# Altium PCB Main.PcbDoc (part 2 of 2)
Units mm, origin at the board's own origin, x right, y up, seen from the top; angles counter-clockwise.
Board outline 112.5 x 86 mm, 4 copper layers (Top Layer, Layer 2, Layer 3, Bottom Layer), stack 1.334 mm thick; 103 components, 96 nets, 354 pads, 15 vias.
Unrouted connection lines stored in the file: 144.
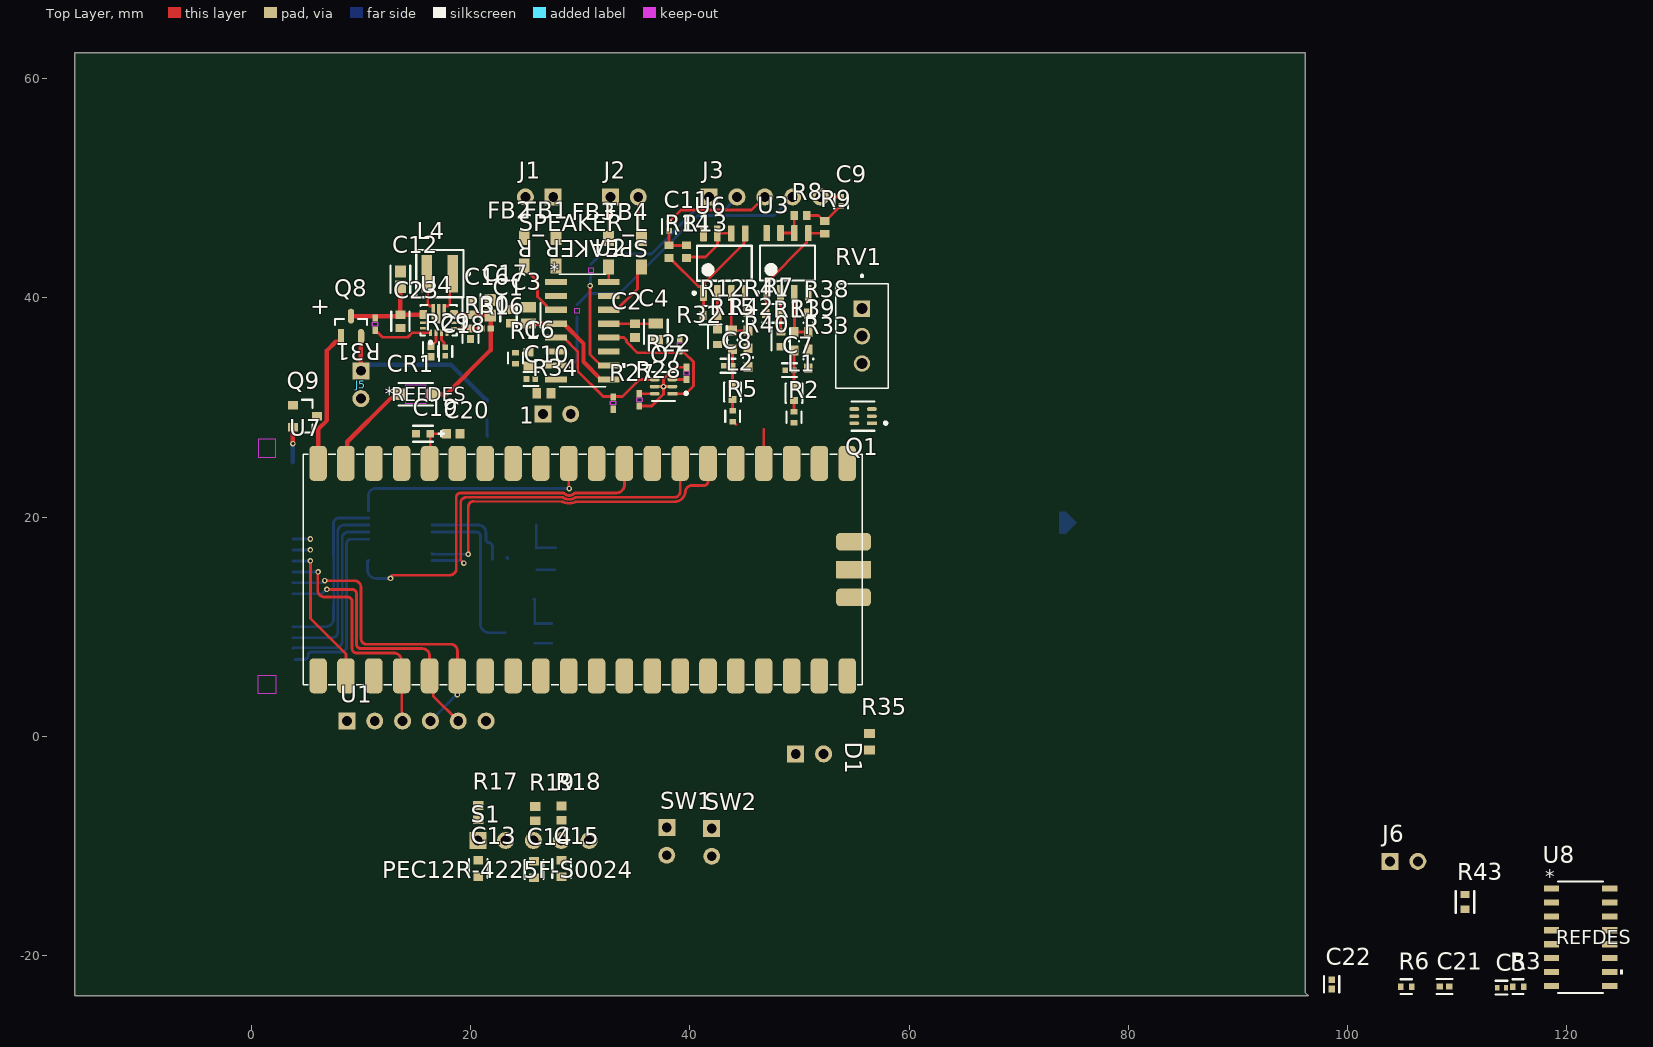
[diagram p0: Top Layer view]

## Via types
v1: diameter 0.508, hole 0.256, Top Layer to Bottom Layer, 15 vias

## Nets (pads, with @x,y where several pads share a name; then routed paths per layer and width w, separated by ;. In a path a pad name is that pad's centre, name@x,y a point inside that pad or via, vN(x,y) a via of type N, cw(c..) or ccw(c..) an arc to the next point about the centre after c; other vN are vias at no path point) (continued)
NetR7_2: (continued)
  Top Layer w0.254: R7.2 47,38.647 U3.1 47.037,40.487 47.037,41.407 50.657,45.027 50.657,45.747 U3.5 50.835,45.875 R9.1@52.3,45.875
NetR8_1: R8.1 U3.6 U3.7 | length 2.9
  Top Layer w0.254: U3.7 U3.6 49.532,45.908 49.532,47.493 R8.1
NetR10_2: R10.2 U2.10 | length 9.3
  Top Layer w0.254: v1(30.9,41.1) 30.9,34.827 31.902,33.825 U2.10
  Bottom Layer w0.254: v1(30.9,41.1) 30.949,41.149 30.949,41.89 R10.2
NetR12_1: R12.1 R15.2 U6.2 | length 3.5
  Top Layer w0.254: U6.2 42.515,38.4 R15.2 R15.2@42.6,37
NetR12_2: R12.2 R14.1 U6.1 U6.5 | length 12.9
  Top Layer w0.254: R14.1 38.175,43.625 40.777,41.023 41.263,41.023 41.348,40.938 41.348,41.348 44.952,44.952 44.952,45.772 U6.5 ; R12.2@41.245,38.4 U6.1
NetR13_1: R13.1 U6.6 U6.7 | length 5.7
  Top Layer w0.254: R13.1@39.7,43.575 39.842,43.717 41.417,43.717 42.515,44.815 U6.7 U6.6
NetR16_1: R16.1 R30.2 U4.5 | length 2.5
  Top Layer w0.254: U4.5 19.075,37.225 19.1,37.2 R30.2 R16.1
NetR29_1: R29.1 U4.2 | length 1.4
  Top Layer w0.254: R29.1 16.4,35.6 16.609,35.809 16.631,35.809 16.85,36.029 U4.2
NetR31_2: R31.2 U4.1 U4.14 | length 5.5
  Top Layer w0.254: R31.2 11.3,36.965 11.427,36.838 11.538,36.838 11.976,36.4 13.9,36.4 14.279,36.4 14.679,36.8 U4.1
NetR33_1: R33.1 R38.2 R39.2 U3.3 | length 6.5
  Top Layer w0.254: U3.3 49.54,36.91 R39.2 R38.2 R33.1
NetR40_1: R40.1 R41.2 R42.2 U6.3 | length 6.5
  Top Layer w0.254: U6.3 43.785,37.115 R42.2 R41.2 R40.1
NetU5_8: U5.8 U7.31 | length 22.2
  Top Layer w0.254: U7.31 28.96,22.84 v1@29,22.8
  Bottom Layer w0.254: U5.8 cw(c10.725,20.6) 10.7,20.6 10.7,22 cw(c11.3,22) 11.3,22.6 v1(29,22.6)
PH_RES_IN: 1.2 R34.2 U5.10
R_FILTERED_2: C8.1 L2.2 Q1.3 R42.1 | length 3.1
  Top Layer w0.254: L2.2@43.9,32.175 C8.1 R42.1
R_PWM: R5.1 U7.25 | length 0.4
  Top Layer w0.254: R5.1@43.95,28.7 44.2,28.45
RADIO_EN: Q1.2 Q1.5 R43.2 U7.22 U8.9
RIN_AMP_2: J3.2 R10.1 | length 15.9
  Bottom Layer w0.254: R10.1 31.941,44 36.5,44 40.544,48.044 43.244,48.044 43.6,48.4 43.6,48.476 44.3,49.176 J3.2
ROUT_2_N: FB4.1 U2.14 | length 5.5
  Top Layer w0.254: U2.14 33.324,38.905 35.227,40.808 35.227,42.427 FB4.1
ROUT_2_P: FB3.1 U2.16 | length 1.4
  Top Layer w0.254: FB3.1 32.613,42.787 U2.16
ROUT_RAD_2: R6.1 U8.16
SCLK: J4.10 U1.3 U7.4 | length 22.7
  Top Layer w0.254: v1(6.1,15) 6.065,14.965 6.065,13.337 ccw(c6.702,13.337) 6.702,12.7 8.8,12.7 cw(c8.8,12.3) 9.2,12.3 9.2,8 ccw(c9.6,8) 9.6,7.6 13,7.6 cw(c13,6.88) 13.72,6.88 U7.4 13.72,1.48 U1.3
  Bottom Layer w0.254: J4.10 v1(6.1,15)
SD_CS_5: U1.6 U7.1
SHDN_5V_2: Q7.1 R32.2 U2.12 | length 13.2
  Top Layer w0.254: U2.12 33.985,36.365 34.22,36.129 34.22,35.984 35.226,34.978 39.2,34.978 39.522,34.978 40.335,34.165 40.335,31.961 39.7,31.326 39.7,31.25 Q7.1
TS_CS: J4.12 U7.7 | length 1.6
  Bottom Layer w0.254: J4.12 v1(5.4,17)
TS_DC: J4.11 U7.2 | length 13.4
  Top Layer w0.254: v1(5.4,16) 5.4,10.74 8.64,7.5 U7.2
  Bottom Layer w0.254: J4.11 v1(5.4,16)
TS_LED: Q9.1 U7.12
TS_RST: J4.13 U7.14 | length 1.6
  Bottom Layer w0.254: J4.13 v1(5.4,18)
TS_XL: J4.3 U5.5 | length 17
  Bottom Layer w0.254: J4.3 3.875,8.075 7.675,8.075 ccw(c7.675,8.7) 8.3,8.7 8.3,18.1 cw(c8.825,18.1) 8.825,18.625 U5.5
TS_XR: J4.5 U5.7 | length 16.3
  Bottom Layer w0.254: J4.5 6.803,10 6.805,10 ccw(c6.805,10.7) 7.505,10.705 cw(c7.759,10.706) 7.505,10.708 7.535,13.39 ccw(c6.9,13.4) 7.535,13.406 7.499,19.412 cw(c8.012,19.412) 8.012,19.925 U5.7
TS_YD: J4.2 U5.4 | length 17
  Bottom Layer w0.254: J4.2@4,7 4.8,7 ccw(c4.8,7.4) 5.2,7.4 cw(c5.5,7.4) 5.5,7.7 8.2,7.7 ccw(c8.2,8.2) 8.7,8.2 8.7,17.6 cw(c9.075,17.6) 9.075,17.975 U5.4
TS_YU: J4.4 U5.6 | length 16.7
  Bottom Layer w0.254: J4.4 7.4,9 ccw(c7.4,9.5) 7.9,9.5 7.9,18.7 cw(c8.475,18.7) 8.475,19.275 U5.6
VSENSE: R36.1 R37.2 U7.34 | length 1.6
  Bottom Layer w0.254: R36.1 21.5,27.4 R37.2
pads on no net: U5.3 U5.9 U7.15 U7.30 U7.32 U7.35 U7.37 U7.D1 U7.D2 U7.D3 U8.5 U8.13

## Silkscreen, mask and mechanical layers (free items; w line width, h text height)
Top Overlay:
  text "+" at 7,38.254 h1.52 r90
Mechanical 6:
  lines w0.254: 3.15,26.55 3.15,15.15 4.45,15.15
  text "'.Designator'" at 28.25,16.803 h1 r90

## Text inside footprints (layer, text, board x,y; h text height)
CR1: Top Overlay "*" at 12.193,30.565 h1.27; Top Overlay "REFDES" at 12.777,30.565 h1.27; Mechanical 13 "RefDes2" at 12.777,30.565 h1.27; Mechanical 13 "*" at 13.489,30.565 h1.27
J4: Mechanical 13 "RefDes2" at -1.7,9.25 h1.27 r270; Bottom Overlay "REFDES" at -1.7,9.25 h1.27 r270
R4: Mechanical 13 "RefDes2" at 29.065,36.578 h1.27 r270; Bottom Overlay "REFDES" at 29.065,36.578 h1.27 r270
R10: Mechanical 13 "RefDes2" at 31.635,44.722 h1.27 r90; Bottom Overlay "REFDES" at 31.635,44.722 h1.27 r90
U2: Top Overlay "*" at 27.216,41.877 h1.27; Mechanical 13 "*" at 28.27,40.658 h1.27
U7: Mechanical 6 "Keep Out" at 18.277,13.427 h1 r180; Mechanical 6 "USB" at 4.68,13.91 h1 r90; Mechanical 6 "Keep Out" at 6.847,12.063 h1 r90; Mechanical 6 "Keep Out" at 9.947,12.063 h1 r90
U8: Top Overlay "*" at 118.011,-13.446 h1.27; Top Overlay "REFDES" at 119.014,-18.958 h1.27; Mechanical 13 "RefDes2" at 119.014,-18.958 h1.27; Mechanical 13 "*" at 119.344,-14.716 h1.27